# EAGLE board Hybrid_PCB (EAGLE 6.6.0)
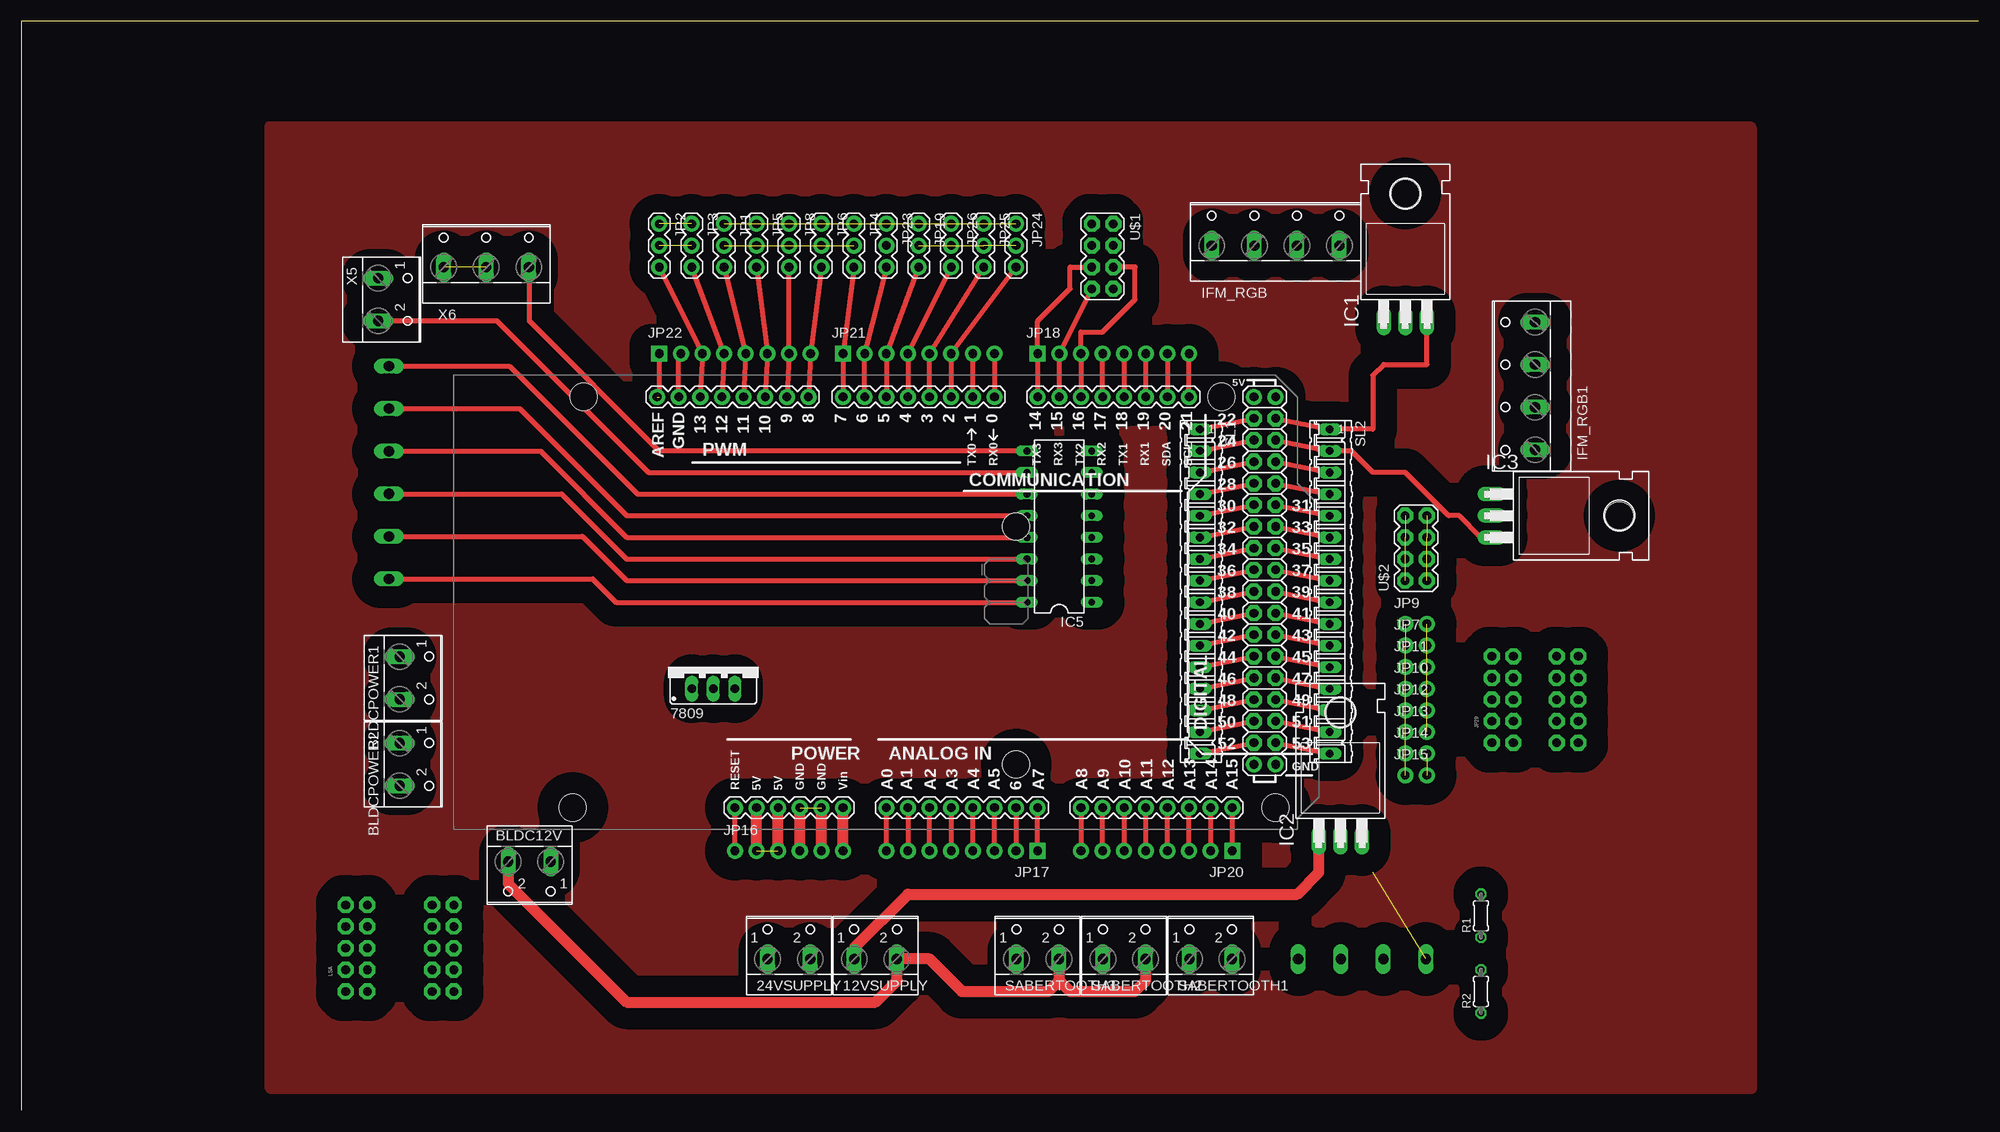
[diagram p0: board, top side]
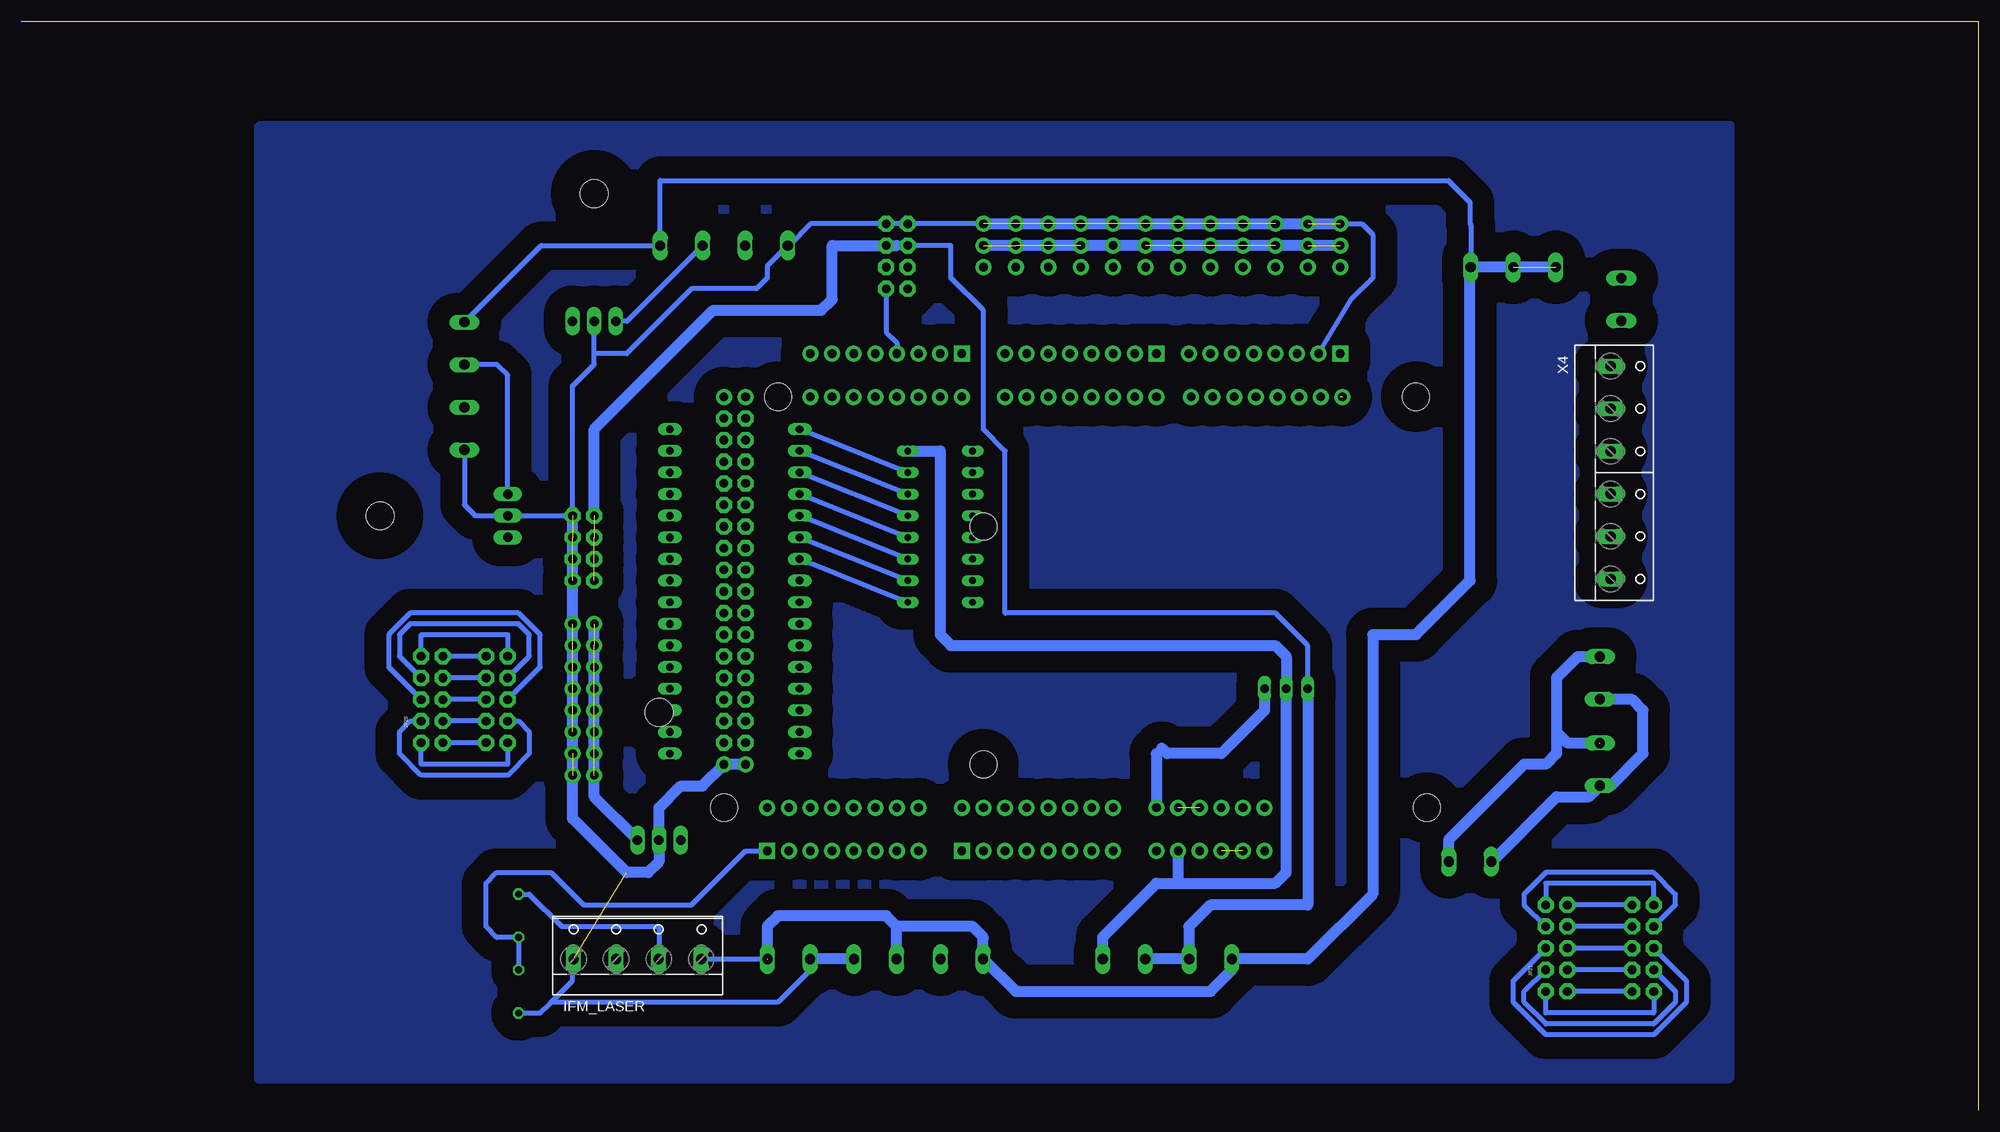
[diagram p1: board, bottom side, seen from below]

Size 229.85 x 127.94 mm. Coordinates in mm from the lower left corner, seen from the top.
Outline: 229.85,127.94 0,127.94 0,0
Copper layers (1*16): Top 0.035mm / dielectric 1.5mm / Bottom 0.035mm
Design rules "default": minimum track width 10mil, minimum drill 24mil, track to track 8mil, track to pad 8mil, pad to pad 8mil, via to via 8mil, smd to smd 8mil, copper to edge 40mil, drill to drill 8mil, minimum pad ring 10mil, minimum via ring 8mil, stop-mask expansion 4mil, vias tented up to drill 0mil, thermal gap 10mil

## Footprints (pad centres in the part's own frame; a part is rotated, then mirrored left to right if it is on the bottom)
W237-102 = drill 1.194 long: 1 -2.5,-1.27; 2 2.5,-1.27
78XXS = drill 1.016 long: GND 0,-2.54; IN -2.54,-2.54; OUT 2.54,-2.54
TO220H = drill 1.118 long: 1 -2.54,-10.16; 2 0,-10.16; 3 2.54,-10.16 | hole 3.302: 0,4.826
DIL16 = drill 0.813 long: 1 -8.89,-3.81; 2 -6.35,-3.81; 3 -3.81,-3.81; 4 -1.27,-3.81; 5 1.27,-3.81; 6 3.81,-3.81; 7 6.35,-3.81; 8 8.89,-3.81; 9 8.89,3.81; 10 6.35,3.81; 11 3.81,3.81; 12 1.27,3.81; 13 -1.27,3.81; 14 -3.81,3.81; 15 -6.35,3.81; 16 -8.89,3.81
W237-4 = drill 1.194 long: 1 -7.5,-1.27; 2 -2.5,-1.27; 3 2.5,-1.27; 4 7.5,-1.27
1X03 = drill 1.016 pad 1.88: 1 0,0; 2 2.54,0; 3 5.08,0
1X02_NO_SILK = drill 1.016 pad 1.88: 1 0,0; 2 2.54,0
1X06_NO_SILK = drill 1.016 pad 1.88: 1 0,0; 2 2.54,0; 3 5.08,0; 4 7.62,0; 5 10.16,0; 6 12.7,0
1X08_PIN1_NO_SILK = drill 1.016 pad 1.88 square: 1 0,0 | drill 1.016 pad 1.88: 2 2.54,0; 3 5.08,0; 4 7.62,0; 5 10.16,0; 6 12.7,0; 7 15.24,0; 8 17.78,0
2X5_NOSILK = drill 1.016 pad 1.88 octagon: 1 -1.27,5.08; 2 1.27,5.08; 3 -1.27,2.54; 4 1.27,2.54; 5 -1.27,0; 6 1.27,0; 7 -1.27,-2.54; 8 1.27,-2.54; 9 -1.27,-5.08; 10 1.27,-5.08
0204/5 = drill 0.813 octagon: 1 -2.54,0; 2 2.54,0
16P = drill 0.914 long: 1 -19.05,0; 2 -16.51,0; 3 -13.97,0; 4 -11.43,0; 5 -8.89,0; 6 -6.35,0; 7 -3.81,0; 8 -1.27,0; 9 1.27,0; 10 3.81,0; 11 6.35,0; 12 8.89,0; 13 11.43,0; 14 13.97,0; 15 16.51,0; 16 19.05,0
ARDUINO_MEGA = drill 1.016 pad 1.88: 0 63.5,50.8; 1 60.96,50.8; 2 58.42,50.8; 3 55.88,50.8; 3.3V 35.56,2.54; 4 53.34,50.8; 5 50.8,50.8; 5V@0 38.1,2.54; 5V@1 93.98,50.8; 5V@2 96.52,50.8; 6 48.26,50.8; 7 45.72,50.8; 8 41.656,50.8; 9 39.116,50.8; 10 36.576,50.8; 11 34.036,50.8; 12 31.496,50.8; 13 28.956,50.8; 14 68.58,50.8; 15 71.12,50.8; 16 73.66,50.8; 17 76.2,50.8; 18 78.74,50.8; 19 81.28,50.8; 20 83.82,50.8; 21 86.36,50.8; A0 50.8,2.54; A1 53.34,2.54; A2 55.88,2.54; A3 58.42,2.54; A4 60.96,2.54; A5 63.5,2.54; A6 66.04,2.54; A7 68.58,2.54; A8 73.66,2.54; A9 76.2,2.54; A10 78.74,2.54; A11 81.28,2.54; A12 83.82,2.54; A13 86.36,2.54; A14 88.9,2.54; A15 91.44,2.54; AREF 23.876,50.8; GND@0 40.64,2.54; GND@1 43.18,2.54; GND@2 93.98,7.62; GND@3 96.52,7.62; GND@4 26.416,50.8; RESET 33.02,2.54; VIN 45.72,2.54 | drill 1.016 pad 1.88 octagon: 22 93.98,48.26; 23 96.52,48.26; 24 93.98,45.72; 25 96.52,45.72; 26 93.98,43.18; 27 96.52,43.18; 28 93.98,40.64; 29 96.52,40.64; 30 93.98,38.1; 31 96.52,38.1; 32 93.98,35.56; 33 96.52,35.56; 34 93.98,33.02; 35 96.52,33.02; 36 93.98,30.48; 37 96.52,30.48; 38 93.98,27.94; 39 96.52,27.94; 40 93.98,25.4; 41 96.52,25.4; 42 93.98,22.86; 43 96.52,22.86; 44 93.98,20.32; 45 96.52,20.32; 46 93.98,17.78; 47 96.52,17.78; 48 93.98,15.24; 49 96.52,15.24; 50 93.98,12.7; 51 96.52,12.7; 52 93.98,10.16; 53 96.52,10.16 | hole 3.2: 15.24,50.8; 13.97,2.54; 66.04,35.56; 66.04,7.62; 90.17,50.8; 96.52,2.54
2X4 = drill 1.016 pad 1.88 octagon: 1 -3.81,-1.27; 2 -3.81,1.27; 3 -1.27,-1.27; 4 -1.27,1.27; 5 1.27,-1.27; 6 1.27,1.27; 7 3.81,-1.27; 8 3.81,1.27
W237-136 = drill 1.194 long: 1 -12.5,-1.27; 2 -7.5,-1.27; 3 -2.5,-1.27; 4 2.5,-1.27; 5 7.5,-1.27; 6 12.5,-1.27
W237-103 = drill 1.194 long: 1 -5,-1.29; 2 0,-1.29; 3 5,-1.29

## Placement (x,y rotation side)
12VSUPPLY  [W237-102]  100.33,19.05 0 top
24VSUPPLY  [W237-102]  90.17,19.05 0 top
7809  [78XXS]  81.28,52.07 0 top
BLDC12V  [W237-102]  59.69,27.94 180 top
BLDCPOWER1  [W237-102]  45.72,50.8 270 top
BLDCPOWER2  [W237-102]  45.72,40.64 270 top
IC1  7805T  [TO220H]  162.56,102.87 0 top
IC2  7805T  [TO220H]  154.94,41.91 0 top
IC3  7805T  [TO220H]  182.88,69.85 270 top
IC5  ULN2003AN  [DIL16]  121.92,68.58 90 top
IFM_LASER  [W237-4]  157.48,19.05 0 bottom
IFM_RGB  [W237-4]  147.32,102.87 0 top
IFM_RGB1  [W237-4]  176.53,85.09 90 top
JP1  [1X03]  82.55,104.14 270 top
JP2  [1X03]  74.93,104.14 270 top
JP3  [1X03]  78.74,104.14 270 top
JP4  [1X03]  97.79,104.14 270 top
JP5  [1X03]  86.36,104.14 270 top
JP6  [1X03]  93.98,104.14 270 top
JP7  M021X02_NO_SILK  [1X02_NO_SILK]  162.56,54.61 0 top
JP8  [1X03]  90.17,104.14 270 top
JP9  M021X02_NO_SILK  [1X02_NO_SILK]  162.56,57.15 0 top
JP10  M021X02_NO_SILK  [1X02_NO_SILK]  162.56,49.53 0 top
JP11  M021X02_NO_SILK  [1X02_NO_SILK]  162.56,52.07 0 top
JP12  M021X02_NO_SILK  [1X02_NO_SILK]  162.56,46.99 0 top
JP13  M021X02_NO_SILK  [1X02_NO_SILK]  162.56,44.45 0 top
JP14  M021X02_NO_SILK  [1X02_NO_SILK]  162.56,41.91 0 top
JP15  M021X02_NO_SILK  [1X02_NO_SILK]  162.56,39.37 0 top
JP16  [1X06_NO_SILK]  83.82,30.48 0 top
JP17  [1X08_PIN1_NO_SILK]  119.38,30.48 180 top
JP18  [1X08_PIN1_NO_SILK]  119.38,88.9 0 top
JP19  [1X03]  105.41,104.14 270 top
JP20  [1X08_PIN1_NO_SILK]  142.24,30.48 180 top
JP21  [1X08_PIN1_NO_SILK]  96.52,88.9 0 top
JP22  [1X08_PIN1_NO_SILK]  74.93,88.9 0 top
JP23  [1X03]  101.6,104.14 270 top
JP24  [1X03]  116.84,104.14 270 top
JP25  [1X03]  113.03,104.14 270 top
JP26  [1X03]  109.22,104.14 270 top
JP28  M05X2NO_SILK  [2X5_NOSILK]  181.61,48.26 0 bottom
JP29  M05X2NO_SILK  [2X5_NOSILK]  173.99,48.26 0 top
JP31  M05X2NO_SILK  [2X5_NOSILK]  49.53,19.05 0 bottom
LSA  M05X2NO_SILK  [2X5_NOSILK]  39.37,19.05 0 top
R1  [0204/5]  171.45,22.86 90 top
R2  [0204/5]  171.45,13.97 90 top
SABERTOOTH1  [W237-102]  139.7,19.05 0 top
SABERTOOTH2  [W237-102]  129.54,19.05 0 top
SABERTOOTH3  [W237-102]  119.38,19.05 0 top
SL1  [16P]  138.43,60.96 270 top
SL2  [16P]  153.67,60.96 270 top
U1  ARDUINO-MEGAFULL  [ARDUINO_MEGA]  50.8,33.02 0 top
U$1  DONGBU  [2X4]  127,100.33 270 top
U$2  M04X2  [2X4]  163.83,66.04 90 top
X4  [W237-136]  41.91,74.93 270 bottom
X5  [W237-102]  43.18,95.25 270 top
X6  [W237-103]  54.61,100.33 0 top

## Library data of the parts
12VSUPPLY 24VSUPPLY BLDC12V BLDCPOWER1 BLDCPOWER2 SABERTOOTH1-SABERTOOTH3 X5 = con-wago-500; MPN: 237-102; OC_FARNELL: unknown; OC_NEWARK: 70K9898
7809 = v-reg
IC1-IC3 = adafruit
IC5 = uln-udn
IFM_LASER IFM_RGB IFM_RGB1 = con-wago-500; OC_FARNELL: unknown; OC_NEWARK: unknown
JP1-JP26 JP28 JP29 JP31 LSA U$1 U$2 = SparkFun-Connectors
R1 R2 = resistor; SPICEPREFIX: R
SL1 SL2 = con-amp-quick; OC_FARNELL: unknown; OC_NEWARK: unknown
U1 = SparkFun-Boards
X4 = con-wago-500; MPN: 237-136; OC_FARNELL: unknown; OC_NEWARK: 84K9151
X6 = con-wago-500; MPN: 237-103; OC_FARNELL: unknown; OC_NEWARK: 18M7116

## Nets
BLDCPOW: BLDC12V.1 BLDCPOWER1.1 BLDCPOWER2.1
N$1: JP18.1 U1.14 U$1.5
N$2: JP18.2 U1.15 U$1.7
N$3: IC2.3 JP7.1 JP9.1 JP10.1 JP11.1 JP12.1 JP13.1 JP14.1 JP15.1
N$4: JP17.8 U1.A0
N$5: JP18.3 U1.16 U$1.6
N$6: JP18.4 U1.17 U$1.8
N$7: JP18.5 U1.18
N$8: JP18.6 U1.19
N$9: JP18.7 U1.20
N$10: JP17.7 U1.A1
N$11: JP17.6 U1.A2
N$12: 12VSUPPLY.1 24VSUPPLY.2 7809.IN IC2.1 U$1.3 U$1.4 U$2.2 U$2.4 U$2.6 U$2.8
N$13: JP17.4 U1.A4
N$14: JP17.3 U1.A5
N$15: JP17.2 U1.A6
N$16: JP20.8 U1.A8
N$17: JP20.7 U1.A9
N$18: JP17.1 U1.A7
N$19: JP20.6 U1.A10
N$20: JP20.5 U1.A11
N$21: JP20.4 U1.A12
N$22: JP16.1 U1.RESET
N$23: 7809.OUT
N$25: JP18.8 U1.21
N$26: JP20.3 U1.A13
N$27: IC5.7 SL1.1 U1.22
N$28: JP20.2 U1.A14
N$29: JP20.1 R1.1 R2.2 U1.A15
N$30: JP17.5 U1.A3
N$31: JP21.8 U1.0
N$32: JP21.7 U1.1
N$33: JP21.6 JP24.3 U1.2
N$34: JP21.5 JP25.3 U1.3
N$35: JP21.4 JP26.3 U1.4
N$36: JP19.3 JP21.3 U1.5
N$37: JP21.2 JP23.3 U1.6
N$38: JP4.3 JP21.1 U1.7
N$39: JP6.3 JP22.8 U1.8
N$40: JP8.3 JP22.7 U1.9
N$41: JP5.3 JP22.6 U1.10
N$42: JP1.3 JP22.5 U1.11
N$43: JP3.3 JP22.4 U1.12
N$44: JP2.3 JP22.3 U1.13
N$45: JP22.1 U1.AREF
N$46: IC5.6 SL1.2 U1.24
N$47: IC5.5 SL1.3 U1.26
N$48: IC5.4 SL1.4 U1.28
N$49: IC5.3 SL1.5 U1.30
N$50: IC5.2 SL1.6 U1.32
N$51: IC5.1 SL1.7 U1.34
N$52: SL1.8 U1.36
N$53: JP16.2 JP16.3 U1.5V@0
N$54: SL1.9 U1.38
N$55: SL1.10 U1.40
N$56: SL1.11 U1.42
N$57: SL1.12 U1.44
N$58: SL1.13 U1.46
N$59: SL1.14 U1.48
N$60: SL1.15 U1.50
N$61: SL1.16 U1.52
N$62: IC1.3 SL2.1 U1.23
N$63: IC3.3 SL2.2 U1.25
N$64: SL2.3 U1.27
N$65: SL2.4 U1.29
N$66: SL2.5 U1.31
N$67: SL2.6 U1.33
N$68: SL2.7 U1.35
N$69: SL2.8 U1.37
N$70: SL2.9 U1.39
N$71: SL2.10 U1.41
N$72: SL2.11 U1.43
N$73: SL2.12 U1.45
N$74: SL2.13 U1.47
N$75: SL2.14 U1.49
N$76: SL2.15 U1.51
N$77: SL2.16 U1.53
N$78: 12VSUPPLY.2 7809.GND BLDC12V.2 BLDCPOWER1.2 BLDCPOWER2.2 IC1.2 IC2.2 IC3.2 IC5.8 IFM_LASER.1 IFM_RGB1.1 IFM_RGB.1 JP1.1 JP2.1 JP3.1 JP4.1 JP5.1 JP6.1 JP7.2 JP8.1 JP9.2 JP10.2 JP11.2 JP12.2 JP13.2 JP14.2 JP15.2 JP16.4 JP16.5 JP19.1 JP22.2 JP23.1 JP24.1 JP25.1 JP26.1 R2.1 SABERTOOTH1.1 SABERTOOTH2.2 SABERTOOTH3.2 U1.GND@0 U1.GND@2 U1.GND@3 U1.GND@4 U$1.1 U$1.2 U$2.1 U$2.3 U$2.5 U$2.7
N$82: IC1.1 IFM_RGB.3
N$83: IFM_RGB.2
N$84: IC3.1 IFM_RGB1.3
N$85: IFM_RGB1.2
N$86: 24VSUPPLY.1 IC5.9 IFM_LASER.4 IFM_RGB1.4 IFM_RGB.4 SABERTOOTH1.2 SABERTOOTH2.1 SABERTOOTH3.1 X6.1 X6.2 X6.3
N$87: IFM_LASER.3 R1.2
N$88: IFM_LASER.2
N$89: JP28.2 JP29.2
N$90: JP28.4 JP29.4
N$91: JP28.6 JP29.6
N$92: JP28.8 JP29.8
N$93: JP28.10 JP29.10
N$94: JP28.1 JP29.1
N$95: IC5.16 X4.6
N$96: IC5.15 X4.5
N$97: IC5.14 X4.4
N$98: IC5.13 X4.3
N$99: IC5.12 X4.2
N$100: IC5.11 X4.1
N$101: IC5.10 X5.2
N$102: JP28.3 JP29.3
N$103: JP28.5 JP29.5
N$104: JP1.2 JP2.2 JP3.2 JP4.2 JP5.2 JP6.2 JP8.2 JP19.2 JP23.2 JP24.2 JP25.2 JP26.2
N$105: JP28.9 JP29.9
N$106: JP28.7 JP29.7
N$107: JP31.2 LSA.2
N$108: JP31.4 LSA.4
N$109: JP31.6 LSA.6
N$110: JP31.8 LSA.8
N$111: JP31.10 LSA.10
N$112: JP31.9 LSA.9
N$113: JP31.7 LSA.7
N$114: JP31.5 LSA.5
N$115: JP31.1 LSA.1
N$116: JP31.3 LSA.3
S$1: JP16.6 U1.VIN

## Tracks (layer width: path | path; a pad name or v marks a point on that pad's centre or on a via)
BLDCPOW  (1 unrouted)
  Bottom 1.27: 49.53,44.45 49.53,50.8 47.03,53.3 BLDCPOWER1.1 | 49.53,44.45 48.26,43.18 44.49,43.18 | 49.53,44.45 49.53,41.91 50.8,40.64 53.34,40.64 62.23,31.75 62.23,29.25 BLDC12V.1
N$1
  Top 0.61: U1.14 JP18.1 119.38,92.71 123.19,96.52 123.19,99.06 U$1.5
N$2
  Top 0.61: U1.15 JP18.2 U$1.7
N$3  (7 unrouted)
  Bottom 1.27: IC2.3 162.56,36.83 JP9.1
N$4
  Top 0.61: JP17.8 U1.A0
N$5
  Top 0.61: U$1.6 130.81,99.06 130.81,95.25 127,91.44 124.46,91.44 JP18.3 U1.16
N$6
  Top 0.61: U1.17 JP18.4
  Bottom 0.61: U$1.8 128.27,91.44 127,90.17 JP18.4
N$7
  Top 0.61: JP18.5 U1.18
N$8
  Top 0.61: U1.19 JP18.6
N$9
  Top 0.61: JP18.7 U1.20
N$10
  Top 0.61: U1.A1 JP17.7
N$11
  Top 0.61: JP17.6 U1.A2
N$12  (3 unrouted)
  Top 1.27: 12VSUPPLY.1 97.83,19.09 104.14,25.4 149.86,25.4 152.4,27.94 IC2.1
  Bottom 0.61: U$1.4 127,101.6 U$1.3 120.65,101.6 120.65,97.79 116.84,93.98 116.84,80.01 114.3,77.47 114.3,58.42 82.55,58.42 78.74,54.61 7809.IN
  Bottom 1.27: 12VSUPPLY.1 24VSUPPLY.2 92.71,17.82 92.71,21.59 90.17,24.13 78.74,24.13 7809.IN | U$2.8 162.56,80.01 148.59,93.98 135.89,93.98 134.62,95.25 134.62,101.6 127,101.6
N$13
  Top 0.61: JP17.4 U1.A4
N$14
  Top 0.61: JP17.3 U1.A5
N$15
  Top 0.61: U1.A6 JP17.2
N$16
  Top 0.61: U1.A8 JP20.8
N$17
  Top 0.61: JP20.7 U1.A9
N$18
  Top 0.61: JP17.1 U1.A7
N$19
  Top 0.61: U1.A10 JP20.6
N$20
  Top 0.61: JP20.5 U1.A11
N$21
  Top 0.61: JP20.4 U1.A12
N$22
  Top 0.61: JP16.1 U1.RESET
N$23
  Bottom 1.27: 7809.OUT 83.82,46.99 88.9,41.91 95.25,41.91 95.88,42.54
N$24
  pour Bottom (isolate 2.54): 197.87,120.65 arc-90 198.12,120.4
N$25
  Top 0.61: U1.21 JP18.8
N$26
  Top 0.61: JP20.3 U1.A13
N$27
  Top 0.61: SL1.1 U1.22
  Bottom 0.61: IC5.7 SL1.1
N$28
  Top 0.61: U1.A14 JP20.2
N$29
  Top 0.61: JP20.1 U1.A15
  Bottom 0.61: R2.2 R1.1 173.99,20.32 175.26,21.59 175.26,26.67 173.99,27.94 167.64,27.94 163.83,24.13 151.13,24.13 144.78,30.48 JP20.1
N$30
  Top 0.61: U1.A3 JP17.5
N$31
  Top 0.61: JP21.8 U1.0
N$32
  Top 0.61: U1.1 JP21.7
N$33
  Top 0.61: U1.2 JP21.6 JP24.3
N$34
  Top 0.61: U1.3 JP21.5 JP25.3
N$35
  Top 0.61: U1.4 JP21.4 JP26.3
N$36
  Top 0.61: U1.5 JP21.3 JP19.3
N$37
  Top 0.61: U1.6 JP21.2 JP23.3
N$38
  Top 0.61: U1.7 JP21.1 JP4.3
N$39
  Top 0.61: U1.8 JP22.8 JP6.3
N$40
  Top 0.61: U1.9 JP22.7 JP8.3
N$41
  Top 0.61: U1.10 JP22.6 JP5.3
N$42
  Top 0.61: U1.11 JP22.5 JP1.3
N$43
  Top 0.61: U1.12 JP22.4 JP3.3
N$44
  Top 0.61: U1.13 JP22.3 JP2.3
N$45  (via drill 0.6)  (1 unrouted)
  Top 0.61: JP22.1 v74.93,83.82
N$46
  Top 0.61: SL1.2 U1.24
  Bottom 0.61: IC5.6 SL1.2
N$47
  Top 0.61: SL1.3 U1.26
  Bottom 0.61: IC5.5 SL1.3
N$48
  Top 0.61: SL1.4 U1.28
  Bottom 0.61: IC5.4 SL1.4
N$49
  Top 0.61: SL1.5 U1.30
  Bottom 0.61: IC5.3 SL1.5
N$50
  Top 0.61: SL1.6 U1.32
  Bottom 0.61: IC5.2 SL1.6
N$51
  Top 0.61: SL1.7 U1.34
  Bottom 0.61: IC5.1 SL1.7
N$52
  Top 0.61: SL1.8 U1.36
N$53  (1 unrouted)
  Top 1.27: JP16.3 U1.5V@0 | JP16.2 86.36,35.56
N$54
  Top 0.61: SL1.9 U1.38
N$55
  Top 0.61: SL1.10 U1.40
N$56
  Top 0.61: SL1.11 U1.42
N$57
  Top 0.61: SL1.12 U1.44
N$58
  Top 0.61: SL1.13 U1.46
N$59
  Top 0.61: SL1.14 U1.48
N$60
  Top 0.61: SL1.15 U1.50
N$61
  Top 0.61: SL1.16 U1.52
N$62
  Top 0.61: U1.23 SL2.1 158.75,80.01 158.75,86.36 160.02,87.63 165.1,87.63 IC1.3
N$63
  Top 0.61: U1.25 SL2.2 156.21,77.47 158.75,74.93 162.56,74.93 167.64,69.85 168.91,69.85 171.45,67.31 IC3.3
N$64
  Top 0.61: U1.27 SL2.3
N$65
  Top 0.61: U1.29 SL2.4
N$66
  Top 0.61: U1.31 SL2.5
N$67
  Top 0.61: U1.33 SL2.6
N$68
  Top 0.61: U1.35 SL2.7
N$69
  Top 0.61: U1.37 SL2.8
N$70
  Top 0.61: U1.39 SL2.9
N$71
  Top 0.61: U1.41 SL2.10
N$72
  Top 0.61: U1.43 SL2.11
N$73
  Top 0.61: U1.45 SL2.12
N$74
  Top 0.61: U1.47 SL2.13
N$75
  Top 0.61: U1.49 SL2.14
N$76
  Top 0.61: U1.51 SL2.15
N$77
  Top 0.61: U1.53 SL2.16
N$78  (21 unrouted)
  Top 0.61: U1.GND@4 77.22,88.65 JP22.2
  Top 1.27: BLDC12V.2 57.19,26.63 71.12,12.7 100.33,12.7 102.87,15.24 102.87,17.74 12VSUPPLY.2 106.68,17.78 110.49,13.97 120.55,13.97 arc45 120.72,14.04 121.92,15.24 121.92,17.68 arc45 SABERTOOTH3.2 121.88,15.39 arc45 121.95,15.21 123.19,13.97 130.71,13.97 arc45 130.88,14.04 132.08,15.24 132.08,17.78 SABERTOOTH2.2 | JP16.5 93.98,35.56 | JP16.4 U1.GND@0
  Bottom 0.61: JP2.1 72.39,104.14 71.12,102.87 71.12,97.79 73.66,95.25 JP22.2 | R2.1 168.91,11.43 167.64,12.7 | 167.64,12.7 165.1,15.24 165.1,17.66 IFM_LASER.1 | SABERTOOTH1.1 137.2,16.47 140.97,12.7 167.64,12.7 | JP24.1 U$1.1 U$1.2 137.16,104.14 139.7,101.6 IFM_RGB.1 142.24,99.18 142.24,97.79 143.51,96.52 151.13,96.52 158.75,88.9 162.56,88.9 | 162.56,88.9 IC1.2 | 162.56,88.9 162.56,87.63 165.1,85.09 U$2.7 IC3.2 176.53,69.85 177.8,71.12 IFM_RGB1.1
  Bottom 1.27: U1.GND@2 U1.GND@3 149.86,38.1 152.4,38.1 154.94,35.56 IC2.2 | IC2.2 154.94,29.21 156.21,27.94 158.75,27.94 165.1,34.29 JP15.2 JP9.2 U$2.7 | IC2.2 154.94,30.48 | JP24.1 JP2.1 | IC5.8 121.92,77.47 121.92,55.88 120.65,54.61 82.55,54.61 81.28,53.34 7809.GND 81.28,27.94 82.55,26.67 93.98,26.67 | 12VSUPPLY.2 102.83,20.36 96.52,26.67 93.98,26.67 | SABERTOOTH2.2 SABERTOOTH1.1 | JP16.5 93.98,26.67 | BLDCPOWER1.2 44.41,48.26 40.64,48.26 39.37,46.99 39.37,41.91 43.14,38.14 BLDCPOWER2.2 44.45,38.1 45.72,36.83 49.53,36.83 57.15,29.21 BLDC12V.2
N$80
  pour Bottom (isolate 2.54): 29.21,115.57 201.68,115.57 arc-90 201.93,115.32 201.93,3.81 29.46,3.81 arc-90 29.21,4.06
N$81
  pour Top (isolate 2.54): 29.21,115.57 202.95,115.57 arc-90 203.2,115.32 203.2,2.54 29.46,2.54 arc-90 29.21,2.79 29.21,114.3
N$82
  Bottom 0.61: IFM_RGB.3 158.71,92.71 IC1.1
N$84
  Bottom 0.61: IC3.1 172.72,86.36 173.99,87.63 177.76,87.63 IFM_RGB1.3
N$86  (2 unrouted)
  Top 0.61: IC5.9 74.93,77.47 59.69,92.71 59.69,98.96 X6.3
  Bottom 0.61: IFM_LASER.4 SABERTOOTH1.2 | X6.3 59.61,104.06 59.69,104.14 59.69,106.68 62.23,109.22 154.82,109.22 IFM_RGB.4 168.79,101.6 IFM_RGB1.4
  Bottom 1.27: X6.1 X6.3 59.69,98.96 59.69,62.23 66.04,55.88 71.12,55.88 71.12,25.4 78.74,17.78 24VSUPPLY.1 arc45 87.63,17.68 87.63,16.51 90.17,13.97 113.03,13.97 116.81,17.75 arc-45 SABERTOOTH3.1 116.88,20.25 arc-45 116.95,20.43 118.11,21.59 127.04,21.59 | SABERTOOTH2.1 127.04,21.59 | 127.04,21.59 127.04,21.63 128.27,22.86 140.97,22.86 142.24,21.59 142.24,17.78
N$87
  Bottom 0.61: R1.2 170.18,25.4 166.37,21.59 154.94,21.59 154.94,17.82 IFM_LASER.3
N$89
  Bottom 0.61: JP29.2 JP28.2
N$90
  Bottom 0.61: JP29.4 JP28.4
N$91
  Bottom 0.61: JP29.6 JP28.6
N$92
  Bottom 0.61: JP29.8 JP28.8
N$93
  Bottom 0.61: JP29.10 JP28.10
N$94
  Bottom 0.61: JP28.1 182.88,55.88 172.72,55.88 JP29.1
N$95
  Top 0.61: X4.6 67.11,62.43 69.85,59.69 IC5.16
N$96
  Top 0.61: X4.5 65.92,67.43 71.12,62.23 IC5.15
N$97
  Top 0.61: X4.4 63.46,72.43 71.12,64.77 IC5.14
N$98
  Top 0.61: X4.3 61,77.43 71.12,67.31 IC5.13
N$99
  Top 0.61: X4.2 58.54,82.43 71.12,69.85 IC5.12
N$100
  Top 0.61: X4.1 57.35,87.43 72.39,72.39 IC5.11
N$101
  Top 0.61: X5.2 55.84,92.75 73.66,74.93 IC5.10
N$102
  Bottom 0.61: JP29.3 170.18,53.34 170.18,55.88 171.45,57.15 184.15,57.15 185.42,55.88 185.42,53.34 JP28.3
N$103
  Bottom 0.61: JP29.5 168.91,52.07 168.91,55.88 171.45,58.42 184.15,58.42 186.69,55.88 186.69,52.07 JP28.5
N$104  (8 unrouted)
  Bottom 1.27: JP24.2 JP23.2 JP4.2 JP2.2
N$105
  Bottom 0.61: JP29.9 172.72,40.64 182.88,40.64 JP28.9
N$106
  Bottom 0.61: JP29.7 171.45,45.72 170.18,44.45 170.18,41.91 172.72,39.37 182.88,39.37 185.42,41.91 185.42,44.45 184.15,45.72 JP28.7
N$107
  Bottom 0.61: LSA.2 JP31.2
N$108
  Bottom 0.61: LSA.4 JP31.4
N$109
  Bottom 0.61: LSA.6 JP31.6
N$110
  Bottom 0.61: LSA.8 JP31.8
N$111
  Bottom 0.61: LSA.10 JP31.10
N$112
  Bottom 0.61: LSA.9 38.1,11.43 50.8,11.43 JP31.9
N$113
  Bottom 0.61: LSA.7 35.56,13.97 35.56,12.7 38.1,10.16 50.8,10.16 53.34,12.7 53.34,13.97 JP31.7
N$114
  Bottom 0.61: LSA.5 34.29,15.24 34.29,12.7 38.1,8.89 50.8,8.89 54.61,12.7 54.61,15.24 JP31.5
N$115
  Bottom 0.61: LSA.1 38.1,26.67 50.8,26.67 JP31.1
N$116
  Bottom 0.61: LSA.3 35.56,24.13 35.56,25.4 38.1,27.94 50.8,27.94 53.34,25.4 53.34,24.13 JP31.3
S$1
  Top 1.27: JP16.6 U1.VIN
  Bottom 1.27: 96.52,41.91 U1.VIN